# Altium PCB project_15.PcbDoc
Units mil, origin at the board's own origin, x right, y up, seen from the top; angles counter-clockwise.
Board outline 2675 x 2580 mil, 2 copper layers (Top Layer, Bottom Layer); 12 components, 42 nets, 90 pads, 0 vias.
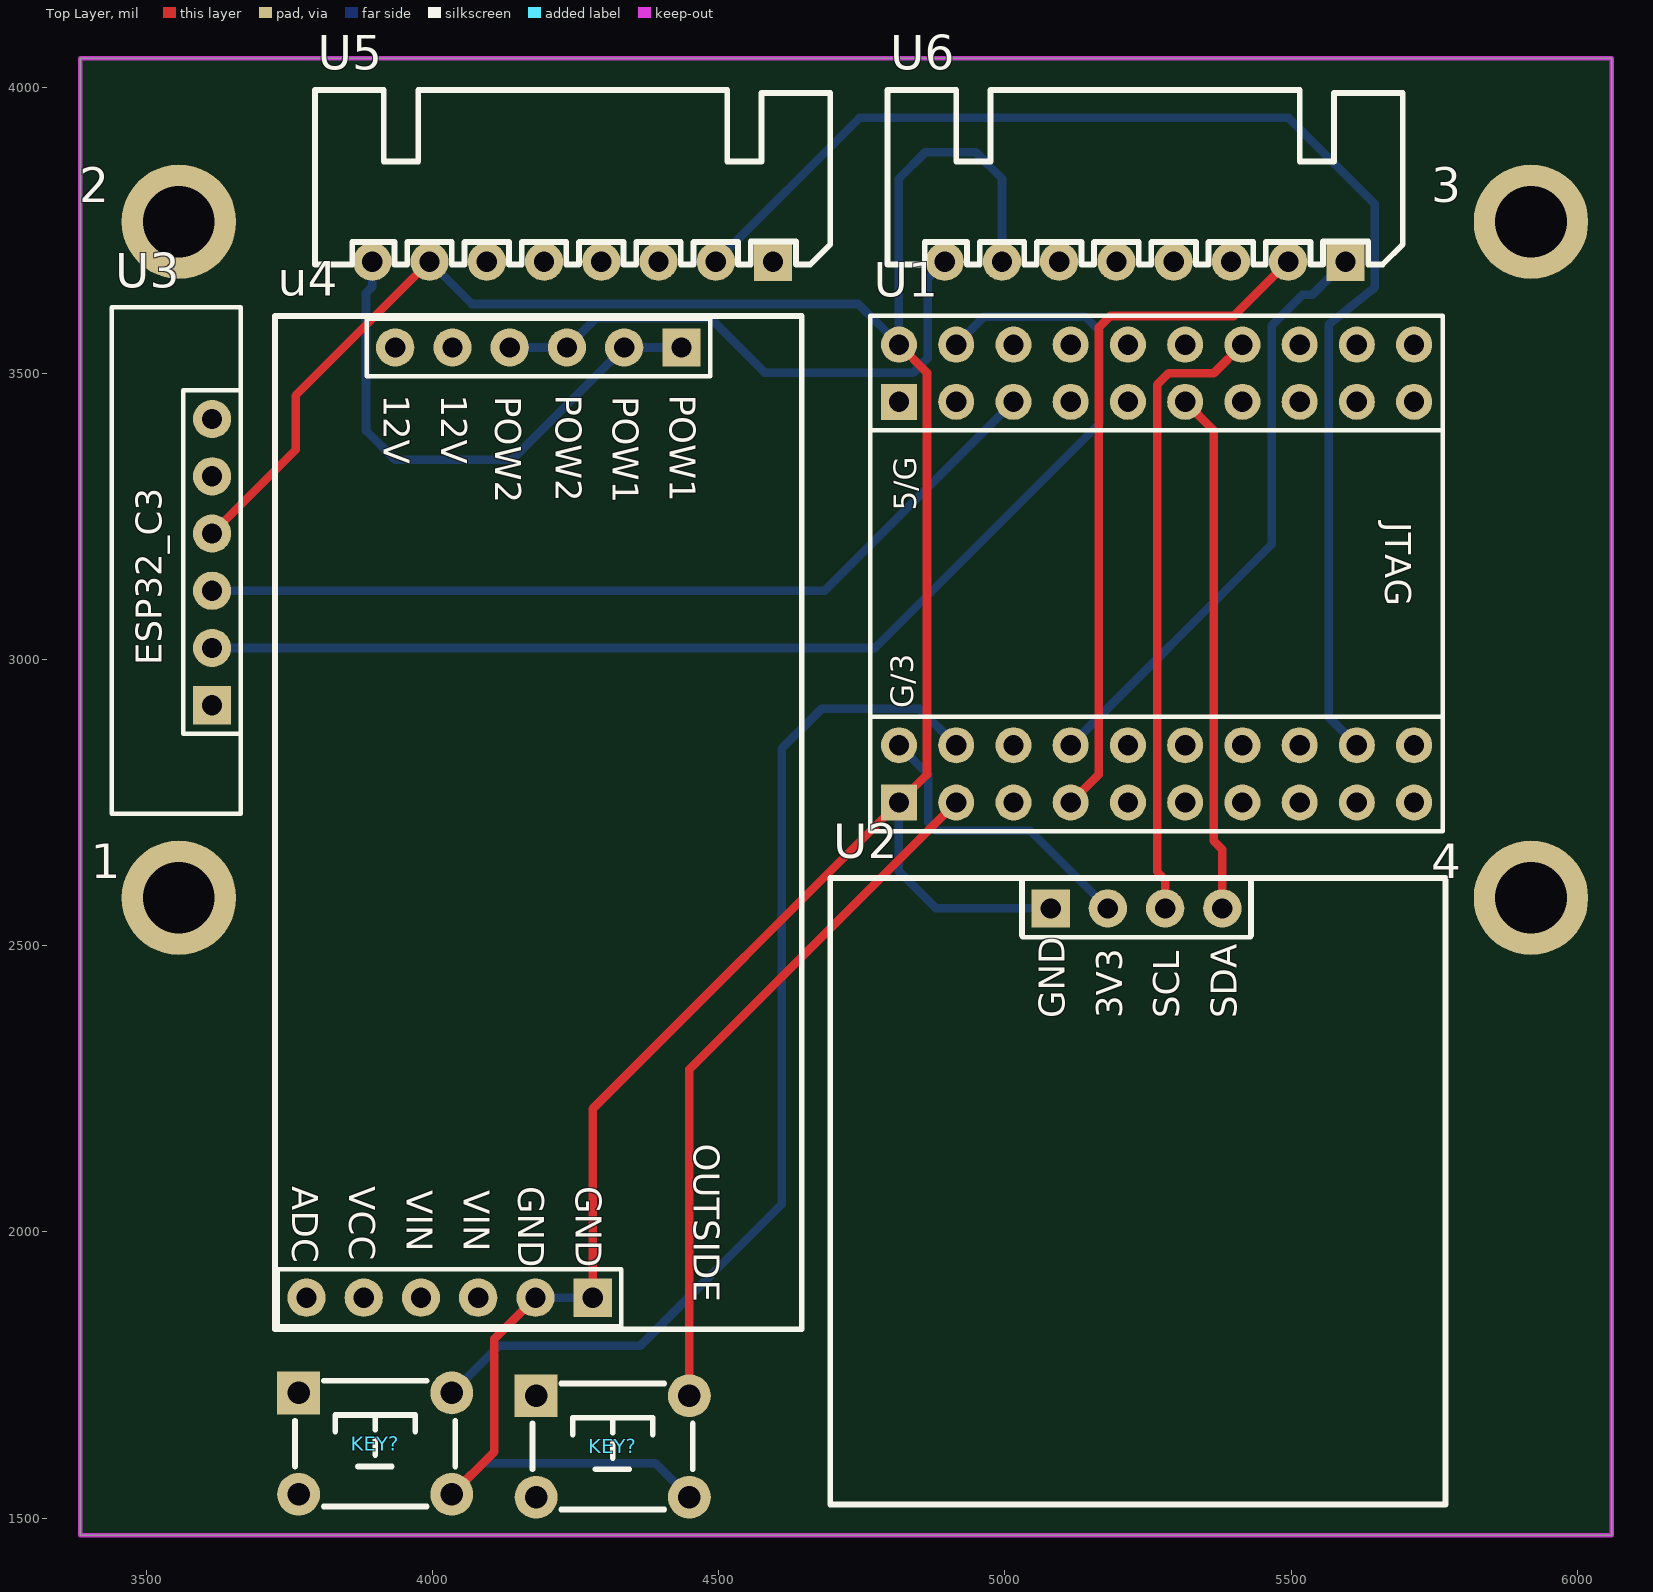
[diagram p0: Top Layer view]
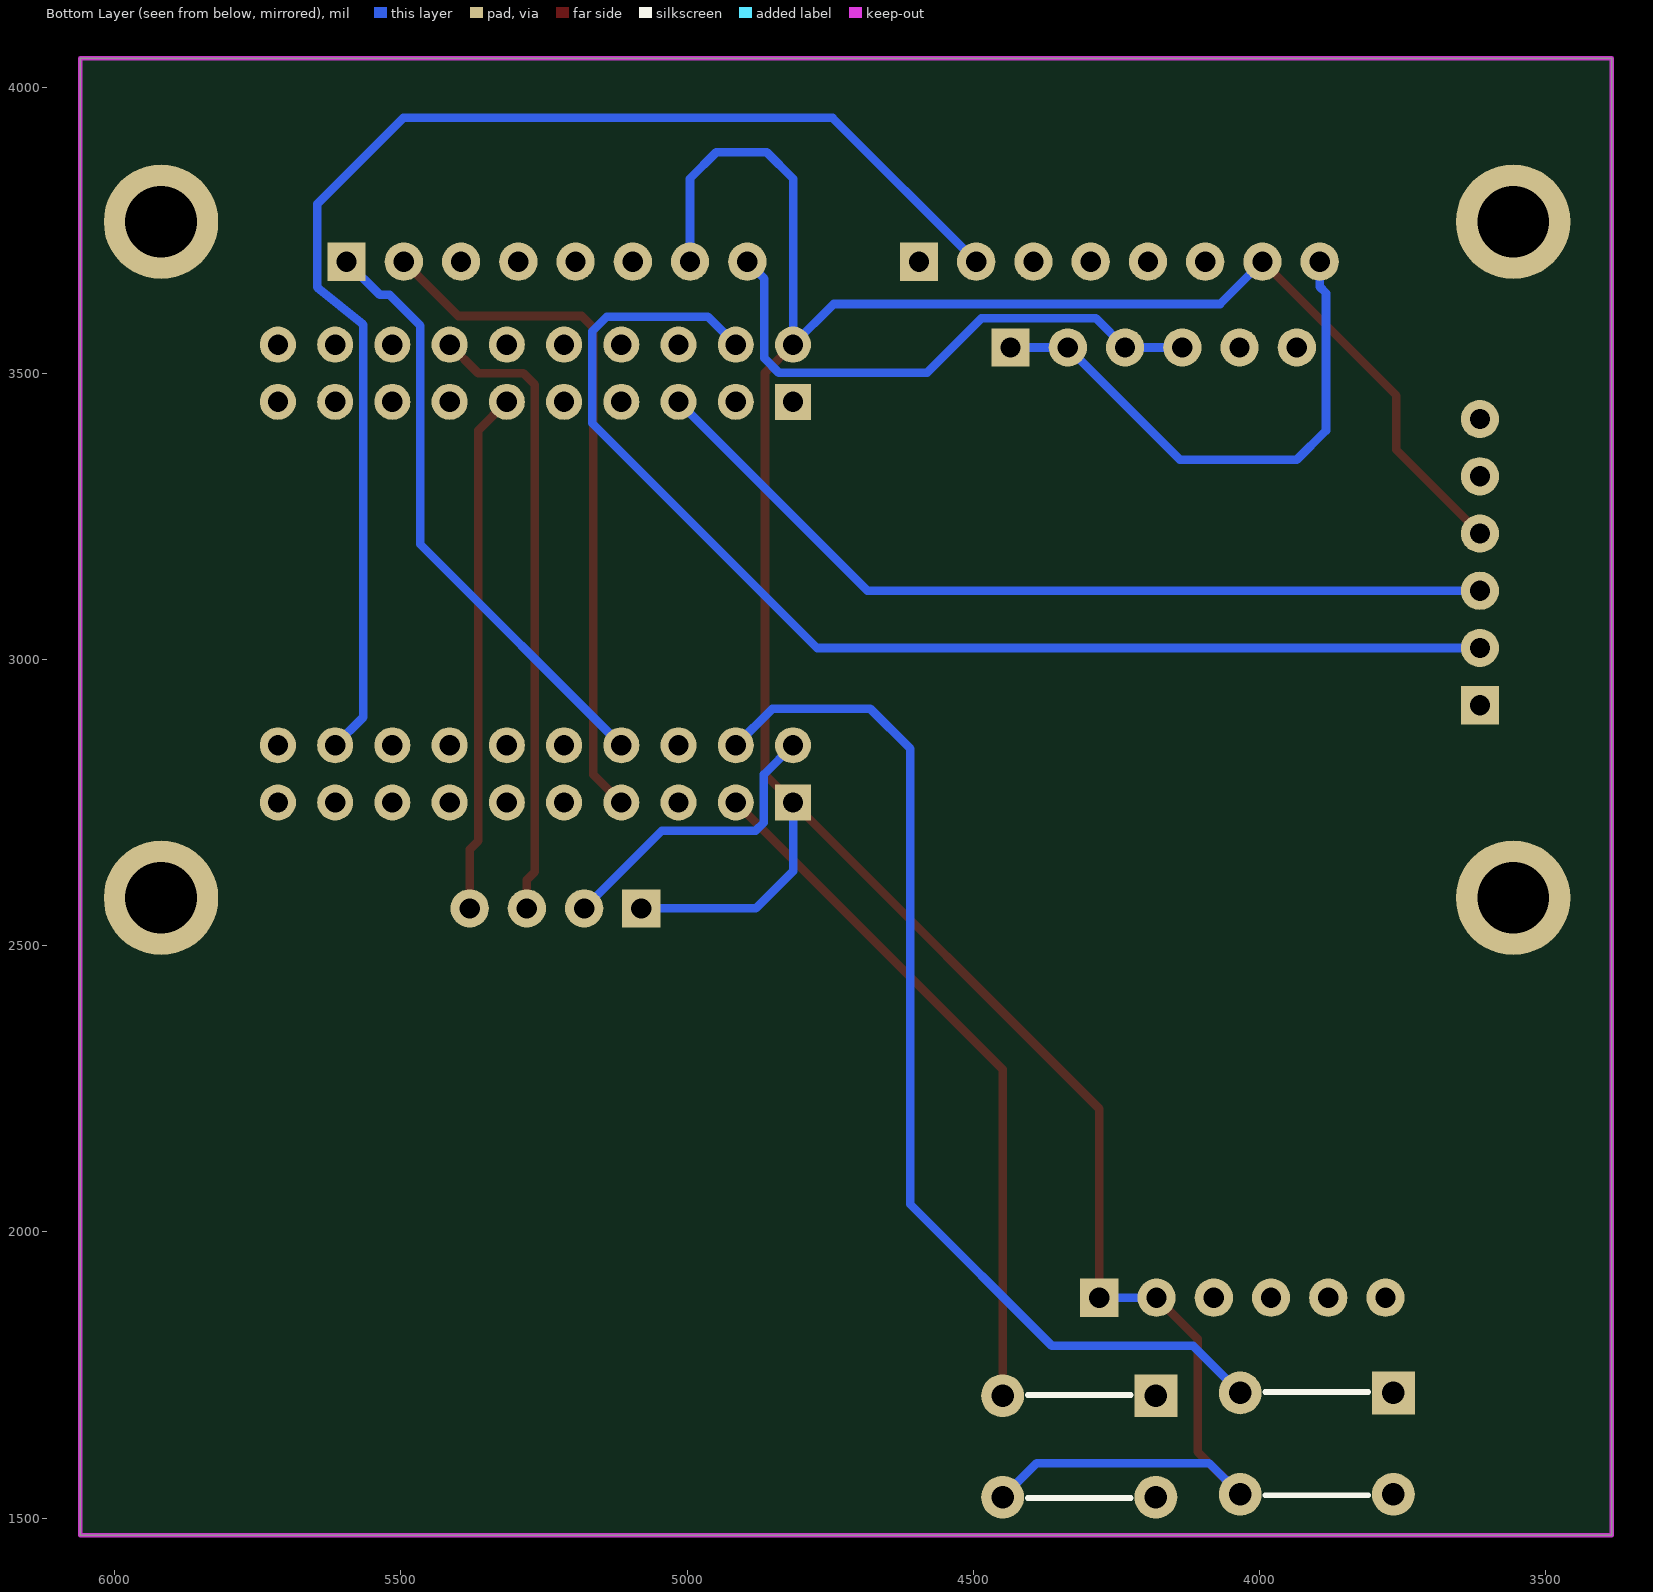
[diagram p1: Bottom Layer view, seen from below]

## Layer stack, top to bottom
Top Solder: solder mask 0.4, Solder Resist, Dk 3.5
Top Layer: signal copper 1.4
Dielectric 1: dielectric 12.6, FR-4, Dk 4.8
Bottom Layer: signal copper 1.4
Bottom Solder: solder mask 0.4, Solder Resist, Dk 3.5

## Board outline
3385,1470 3385,4050 6060,4050 6060,1470

## Design rules (kind name [scope] priority, off if disabled: settings)
Clearance [All] p1: gap=10 ignorepadtopadclearanceinfootprint=FALSE
PolygonConnect [All] p1: connectstyle=Relief reliefconductorwidth=10 reliefentries=4 polygonreliefangle="90 Angle" airgapwidth=10
RoutingVias [All] p1: holewidth=28 width=50 viastyle="Through Hole" minholewidth=28 minwidth=50 maxholewidth=28 maxwidth=50
SolderMaskExpansion [All] p1: expansion=4 istentingtop=FALSE
SupplyNets "Schematic Supply Nets_5" [InNet('12V_1')] p1: voltage=0.000
SupplyNets "Schematic Supply Nets_4" [InNet('12V_2')] p2: voltage=0.000
SupplyNets "Schematic Supply Nets_2" [InNet('3V3')] p3: voltage=0.000
SupplyNets "Schematic Supply Nets_1" [InNet('5V')] p4: voltage=0.000
SupplyNets "Schematic Supply Nets" [InNet('GND')] p5: voltage=0.000
Width [All] p1: maxlimit=100 minlimit=10 preferedwidth=15 minimp=50.000000 maximp=50.000000 favimp=50.000000
30 further rules are at their usual default settings.

## Classes and differential pairs
component class project_15: 1 2 3 4 U1 U2 U3 u4 U5 U6

## Components (designator, comment, footprint, x,y, rotation, side; value= is the part's Value field where it differs from the comment)
1 "M3" "M3 125X200" 3557.01,2583.5 r90 top
2 "M3" "M3 125X200" 3557.01,3764.61 r90 top
3 "M3" "M3 125X200" 5919.21,3764.61 r90 top
4 "M3" "M3 125X200" 5919.21,2583.5 r90 top
KEY? "mod_buttom" MOD_BUTTOM 4305,1625 r0 top
KEY? "mod_buttom" MOD_BUTTOM 3890,1630 r0 top
U1 "f1_hw_1_gw" F1_HW_1_GW 5280,3140 r180 top
U2 "mod_oled" MOD_OLED 5234.91,2563.15 r0 top
U3 "c3_hw_1" C3_HW_1 3615,3170 r90 top
u4 "pow_hw_2" POW_HW_2 4205,2770 r270 top
U5 "mod_ZDTMotor" XH2.54_8P 4230,3770 r90 top
U6 "mod_ZDTMotor" XH2.54_8P 5230,3770 r90 top

## Footprints (in the part's own frame and the unit in brackets; to place one, negate y for a bottom-side part, rotate by r counter-clockwise, add the part's x,y. Pads: shape width x height; smd on the part's side, far side on the other; paste and mask are expansions set on the pad)
C3_HW_1 [mm]
  rect 1.7x1.7 hole 0.9: 1(-6.35,0)
  round 1.7 hole 0.9: 2(-3.81,0) 3(-1.27,0) 4(1.27,0) 5(3.81,0) 6(6.35,0)
  silkscreen extent -11.18,-1.27 11.3,4.45, body extent -11.18,-1.27 11.3,4.45, height 8.5
F1_HW_1_GW [mm]
  rect 1.6x1.6 hole 0.9: 1(11.811,9.906) 21(11.811,-7.874)
  round 1.6 hole 0.9: 2(11.811,7.366) 3(9.271,9.906) 4(9.271,7.366) 5(6.731,9.906) 6(6.731,7.366) 7(4.191,9.906) 8(4.191,7.366) 9(1.651,9.906) 10(1.651,7.366) 11(-0.889,9.906) 12(-0.889,7.366) 13(-3.429,9.906) 14(-3.429,7.366) 15(-5.969,9.906) 16(-5.969,7.366) 17(-8.509,9.906) 18(-8.509,7.366) 19(-11.049,9.906) 20(-11.049,7.366) 22(11.811,-10.414) 23(9.271,-7.874) 24(9.271,-10.414) 25(6.731,-7.874) 26(6.731,-10.414) 27(4.191,-7.874) 28(4.191,-10.414) 29(1.651,-7.874) 30(1.651,-10.414) 31(-0.889,-7.874) 32(-0.889,-10.414) 33(-3.429,-7.874) 34(-3.429,-10.414) 35(-5.969,-7.874) 36(-5.969,-10.414) 37(-8.509,-7.874) 38(-8.509,-10.414) 39(-11.049,-7.874) 40(-11.049,-10.414)
  silkscreen extent -12.32,-11.68 13.08,11.18, body extent -12.38,-11.68 13.08,11.18, height 8.5
"M3 125X200" [mil] "M3螺丝孔，孔125Mil，焊盘200Mil"
  round 200 hole 125: 1(0,0)
MOD_BUTTOM [mm]
  rect 1.9x1.9 hole 1: 1(-3.146,2.25)
  round 1.9 hole 1: 2(-3.146,-2.25) 3(3.654,-2.25) 4(3.654,2.25)
  silkscreen extent -3.3,-2.79 3.81,2.79, body extent -3.85,-3 4.36,3, height 4.25
MOD_OLED [mm] "外购屏幕模块接口"
  rect 1.7x1.7 hole 0.9: 1(-3.935,0.047)
  round 1.7 hole 0.9: 2(-1.395,0.047) 3(1.145,0.047) 4(3.685,0.047)
  silkscreen extent -13.72,-26.4 13.58,1.4, body extent -13.72,-26.42 13.59,1.4, height 8.5
POW_HW_2 [mm] "pow_hw_2"
  round 1.7 hole 0.9: 0(22.479,-8.255) 1(22.479,-5.715) 1(22.479,-3.175) 2(22.479,-0.635) 3(-19.685,-6.858) 3(-19.685,-4.318) 4(-19.685,-1.778) 4(-19.685,0.762) 5(-19.685,3.302) 6(22.479,-10.795)
  rect 1.7x1.7 hole 0.9: 2(22.479,1.905) 5(-19.685,5.842)
  silkscreen extent -21.08,-12.19 23.88,11.18, body extent -21.08,-12.19 23.88,11.18, height 8.5
XH2.54_8P [mm]
  rect 1.7x1.7 hole 0.9: 1(-1.905,-9.271)
  round 1.7 hole 0.9: 2(-1.905,-6.731) 3(-1.905,-4.191) 4(-1.905,-1.651) 5(-1.905,0.889) 6(-1.905,3.429) 7(-1.905,5.969) 8(-1.905,8.509)
  silkscreen extent -2.03,-11.81 5.72,11.05, body extent -2.25,-11.77 5.44,11.01, height 5.75

## Part data
1 2 3 4: library part prot_m3, "m3铜柱孔", BOM名称=铜柱孔, 学习资源=www.ooocke.com, 版权归属=源创客
KEY? KEY?: "6*6*4.3按键"
U2: "oled模块 / 4p排母"
U3: "ESP32C3蓝牙模块 / 6p排母"
u4: "两路升降压电源模块 / 6p排母*2"
U5 U6: "闭环步进,10-29V"

## Nets (pads, with @x,y where several pads share a name; then routed paths per layer and width w, separated by ;. In a path a pad name is that pad's centre, name@x,y a point inside that pad or via, vN(x,y) a via of type N, cw(c..) or ccw(c..) an arc to the next point about the centre after c; other vN are vias at no path point)
3V3: U1.2 U2.2 | length 532.3
  Bottom Layer w15: U1.2 4866,2799 4866,2715 4880,2701 5044,2701 U2.2
5V: U1.21
12V_1: u4.5 U5.8 | length 952.9
  Bottom Layer w15: U5.8 3895,3651 3884,3640 3884,3400 3935,3349 4139,3349 4335,3545 u4.5@4435,3545
12V_2: u4.4 U6.8 | length 982.2
  Bottom Layer w15: u4.4@4135,3545 4235,3545 4285.97,3595.97 4486,3595.97 4580.97,3501 4840,3501 4865,3526 4865,3665 U6.8
BOOT0: U1.35
GND: KEY?.3 U1.1 U1.22 U2.1 U3.4 u4.2 U5.7 U6.7 | length 5471.1
  Top Layer w15: U3.4 3761,3366 3761,3461 U5.7 ; KEY?.3@4033.86,1541.42 4108,1615.56 4108,1813 u4.2@4180,1885 ; u4.2@4280,1885 4280,2215 U1.1 4864,2799 4864,3501 U1.22
  Bottom Layer w15: U5.7 4069.03,3620.97 4744.04,3620.97 U1.22 4815,3840 4861,3886 4949,3886 4995,3840 U6.7 ; KEY?.3@4033.86,1541.42 4088.44,1596 4389.28,1596 KEY?.3@4448.86,1536.42 ; u4.2@4180,1885 u4.2@4280,1885 ; U1.1 4815,2630 4880,2565 U2.1
NRST: U1.12
PA0: U1.20
PA1: U1.19
PA2: U1.18 U5.2 | length 2321.5
  Bottom Layer w15: U5.2 4746,3946 5496,3946 5646,3796 5646,3650 5566,3585 5566,2899 U1.18
PA3: U1.17
PA4: U1.16
PA5: U1.15
PA6: U1.14
PA7: U1.13
PA8: U1.23
PA9: U1.24 U3.2 | length 2155.9
  Bottom Layer w15: U3.2 4773,3020 5166,3413 5166,3573 5140,3599 4964,3599 U1.24
PA10: U1.25 U3.3 | length 1536.7
  Bottom Layer w15: U3.3 4685,3120 U1.25
PA11: U1.26
PA12: U1.27
PA13: U1.28
PA14: U1.29
PA15: U1.30
PB0: U1.11
PB1: U1.9
PB2: U1.10
PB3: U1.32
PB4: U1.31 U2.4 | length 911.9
  Top Layer w15: U1.31 5365,3400 5365,2683 5380,2668 U2.4
PB5: U1.34 U2.3 | length 1098.8
  Top Layer w15: U2.3 5280,2615 5266,2629 5266,3480 5286,3500 5365,3500 U1.34
PB6: U1.33
PB7: U1.36
PB8: U1.38
PB9: U1.37
PB10: U1.7 U6.2 | length 1228.9
  Top Layer w15: U1.7 5164,2799 5164,3580 5184,3600 5400,3600 U6.2
PB11: U1.8 U6.1 | length 1053.8
  Bottom Layer w15: U1.8 5466,3201 5466,3583 5520,3637 5537,3637 U6.1
PB12: U1.5
PB13: U1.6
PB14: KEY?.4@4448.86,1713.58 U1.3 | length 1229.5
  Top Layer w15: KEY?.4@4448.86,1713.58 4448.86,2283.86 U1.3
PB15: KEY?.4@4033.86,1718.58 U1.4 | length 1869.1
  Bottom Layer w15: KEY?.4@4033.86,1718.58 4116.28,1801 4363,1801 4610,2048 4610,2844 4680,2914 4851,2914 U1.4
PC13: U1.39
USART2_RX: U5.1
VBAT: U1.40
pads on no net: 1.1 2.1 3.1 4.1 KEY?.1 KEY?.2 U3.1 U3.5 U3.6 u4.0 u4.1 u4.3 u4.6 U5.3 U5.4 U5.5 U5.6 U6.3 U6.4 U6.5 U6.6

## Keep-outs
Keep-Out Layer:
  lines w7.87: 3385,1470 6025,1470 6060,1470 6060,4050 3385,4050 3385,1470

## Text inside footprints (layer, text, board x,y; h text height)
U1: Top Overlay "5/G" at 4845,3260 h39.37 r90; Top Overlay "G/3" at 4840,2915 h39.37 r90; Top Overlay "JTAG" at 5665,3240 h45 r270
U2: Top Overlay "3V3" at 5204.91,2373.15 h45 r90; Top Overlay "SCL" at 5304.91,2373.15 h45 r90; Top Overlay "SDA" at 5404.91,2373.15 h45 r90; Top Overlay "GND" at 5104.91,2373.15 h45 r90
U3: Top Overlay "ESP32_C3" at 3527.5,2990 h45 r90
u4: Top Overlay "POW2" at 4110,3460 h45 r270; Top Overlay "POW1" at 4315,3460 h45 r270; Top Overlay "12V" at 3915,3462.38 h45 r270; Top Overlay "12V" at 4015,3462.38 h45 r270; Top Overlay "POW2" at 4215,3462.38 h45 r270; Top Overlay "POW1" at 4415,3462.38 h45 r270; Top Overlay "GND" at 4150,2080 h45 r270; Top Overlay "GND" at 4250,2080 h45 r270; Top Overlay "VIN" at 3955,2072.5 h45 r270; Top Overlay "VIN" at 4055,2072.5 h45 r270; Top Overlay "ADC" at 3755,2080 h45 r270; Top Overlay "VCC" at 3855,2080 h45 r270; Top Overlay "OUTSIDE" at 4456.23,2154.16 h45 r270